# Altium PCB MOTORDEMO.PcbDoc
Units mil, origin at the board's own origin, x right, y up, seen from the top; angles counter-clockwise.
Board outline 2390 x 1595 mil, 2 copper layers (Top Layer, Bottom Layer); 56 components, 55 nets, 192 pads, 144 vias.
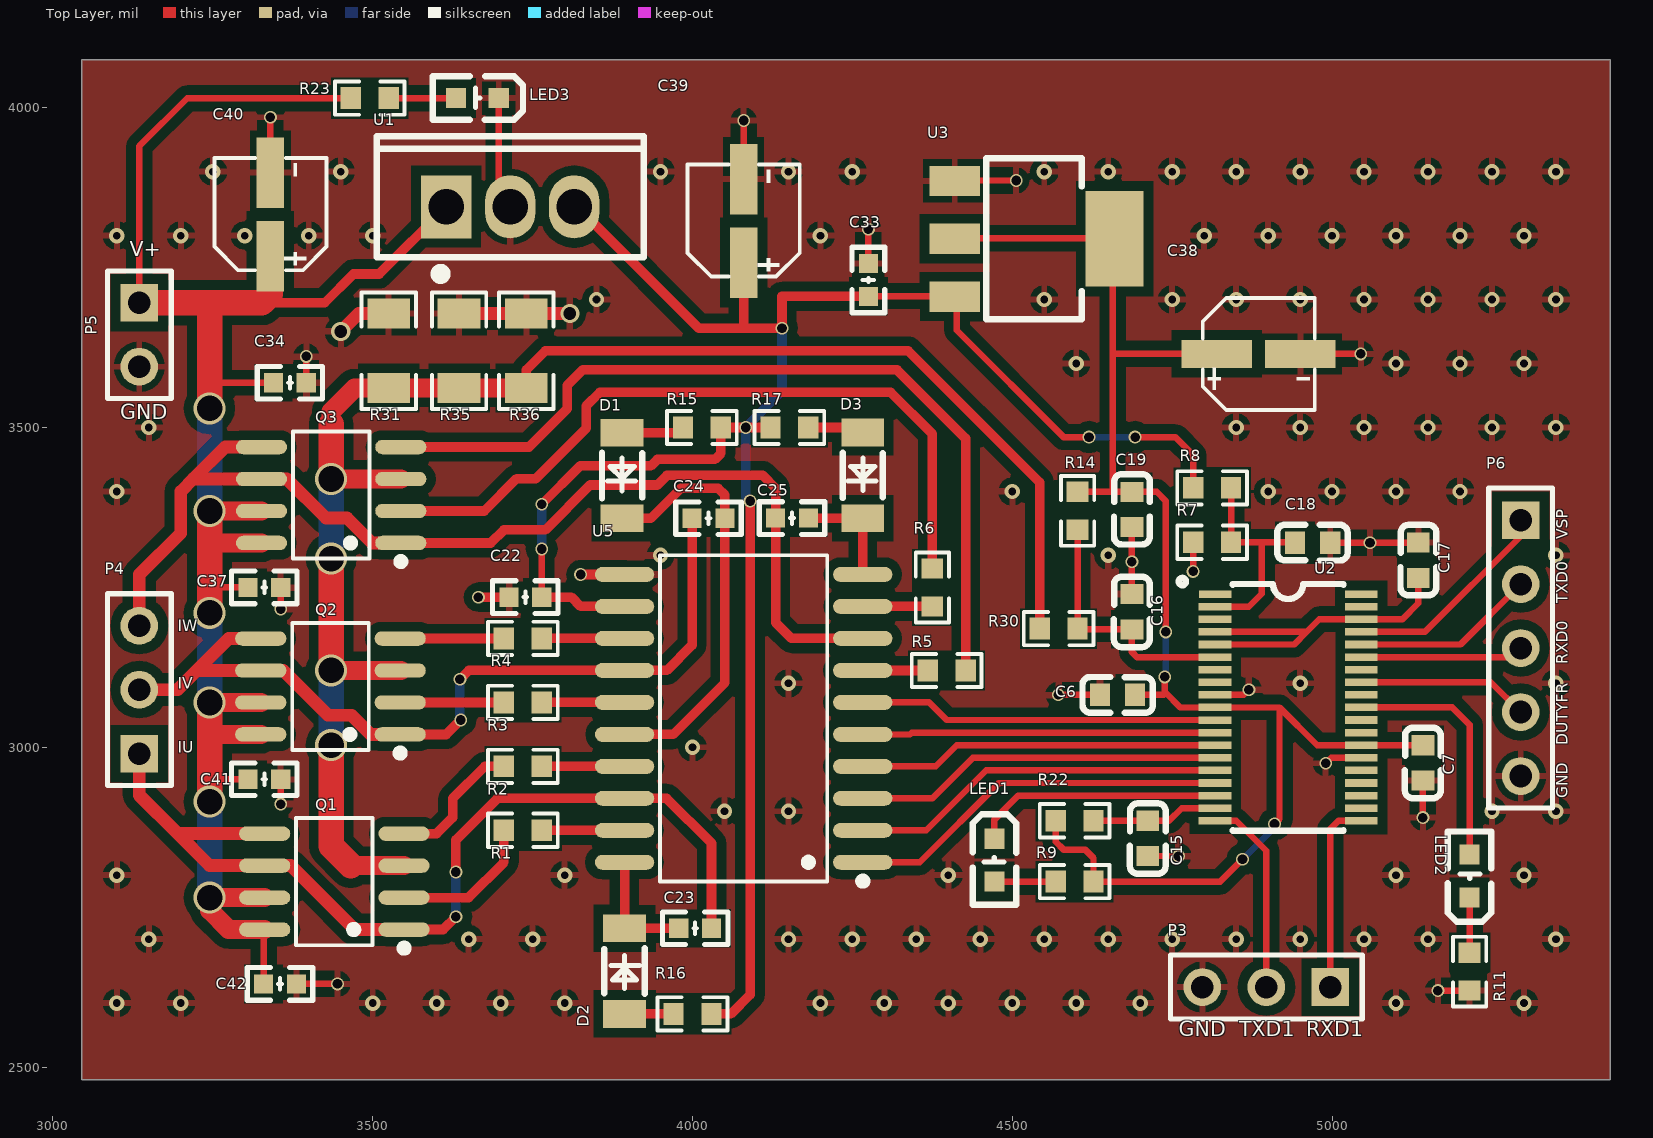
[diagram p0: Top Layer view]
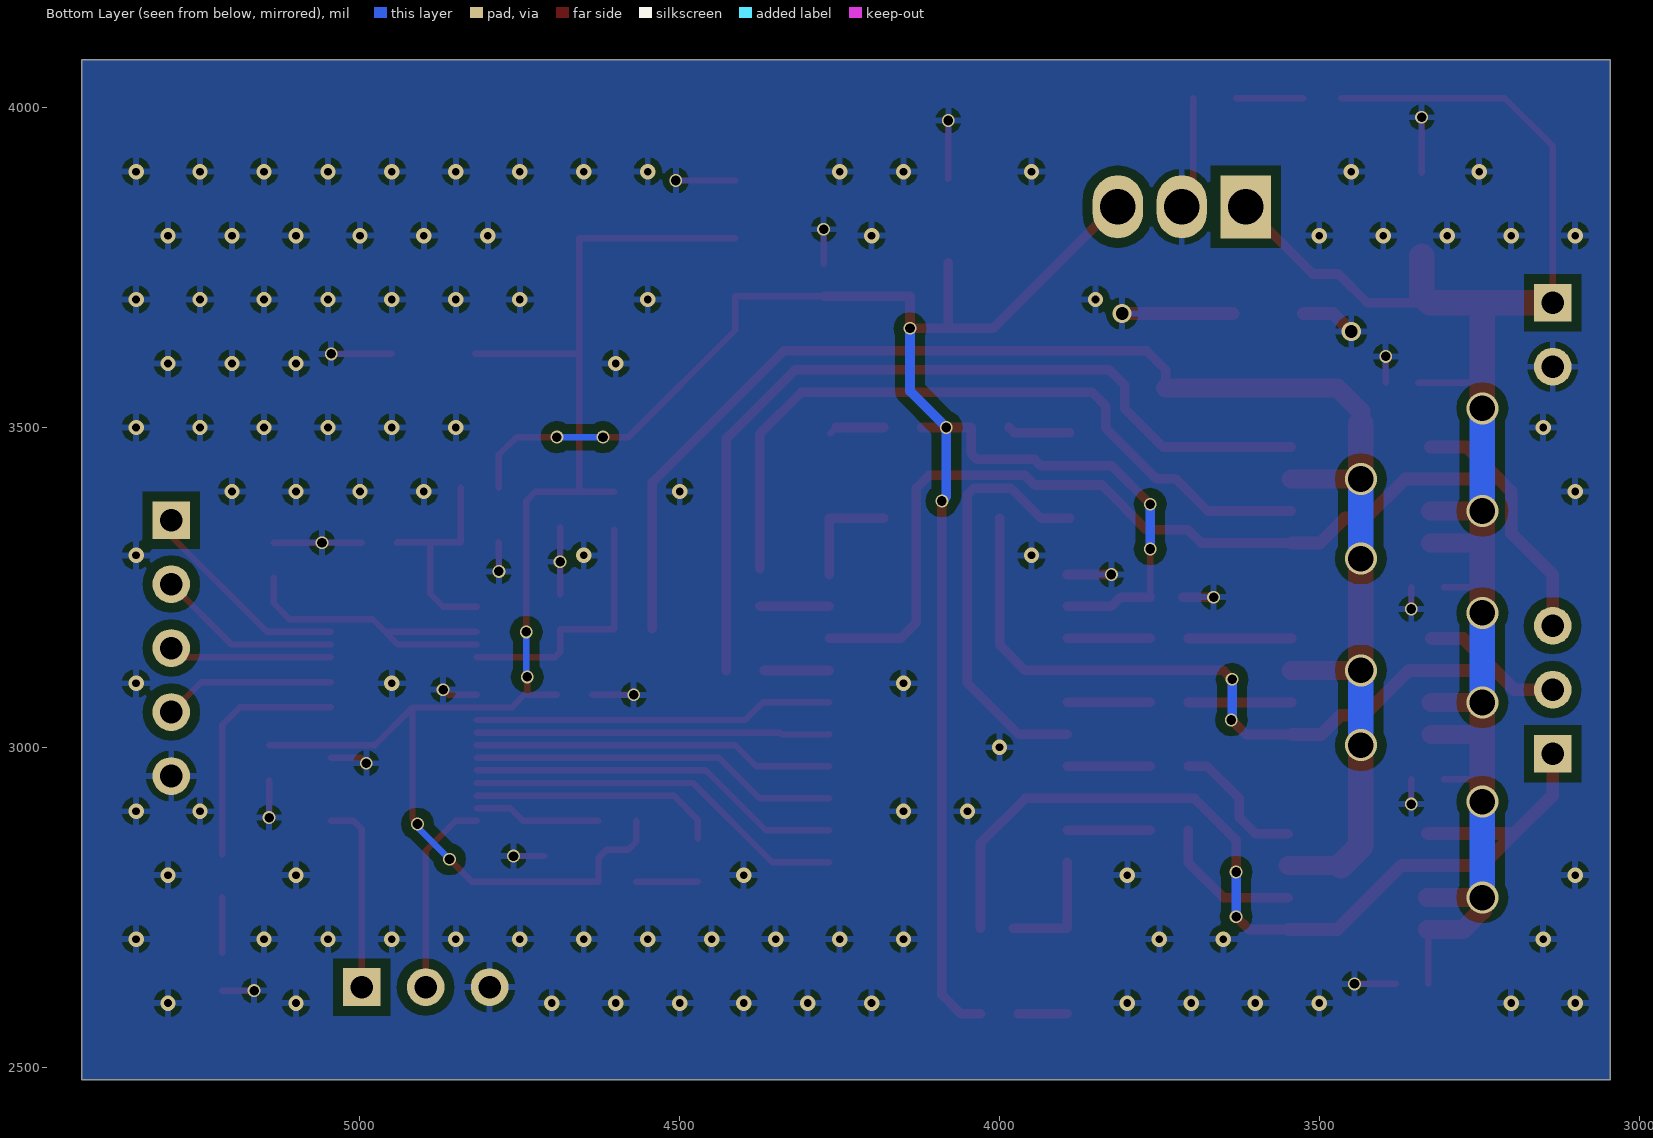
[diagram p1: Bottom Layer view, seen from below]

## Layer stack, top to bottom
Top Solder: solder mask 0.4, Solder Resist, Dk 3.5
Top Layer: signal copper 1.4
Dielectric 1: dielectric 12.6, FR-4, Dk 4.8
Bottom Layer: signal copper 1.4
Bottom Solder: solder mask 0.4, Solder Resist, Dk 3.5

## Board outline
3045,2480 3045,4075 5435,4075 5435,2480

## Design rules (kind name [scope] priority, off if disabled: settings)
Clearance [All] p1: gap=15 ignorepadtopadclearanceinfootprint=FALSE
PolygonConnect [All] p1: connectstyle=Relief reliefconductorwidth=10 reliefentries=4 polygonreliefangle="90 Angle" airgapwidth=10
RoutingVias [All] p1: holewidth=28 width=50 viastyle="Through Hole" minholewidth=28 minwidth=50 maxholewidth=28 maxwidth=50
SolderMaskExpansion [All] p1: expansion=4
Width [All] p1: maxlimit=10 minlimit=10 preferedwidth=10
30 further rules are at their usual default settings.

## Components (designator, comment, footprint, x,y, rotation, side; value= is the part's Value field where it differs from the comment)
C6 "1uF" C0603 4664.5,3081.95 r180 top
C7 "1uF" C0603 5142.06,2975.66 r90 top
C15 "10nF" C0603 4712.06,2857.45 r90 top
C16 "220pF" C0603 4687.06,3211.93 r90 top
C17 "10nF" C0603 5135,3292.34 r270 top
C18 "10nF" C0603 4969.61,3319.89 r0 top
C19 "1uF" C0603 4687.06,3371.76 r270 top
C22 "1uF" "C 0603_L" 3738.72,3234.69 r0 top
C23 "0.1uF" "C 0603_L" 4004.06,2716.93 r180 top
C24 "0.1uF" "C 0603_L" 4025,3358.07 r0 top
C25 "0.1uF" "C 0603_L" 4155.59,3358.24 r180 top
C33 "100nF" "C 0603_L" 4275,3730.59 r90 top
C34 "330nF" "C 0603_L" 3370.59,3570 r0 top
C37 "330nF" "C 0603_L" 3330.59,3250 r180 top
C38 "10uF" 10uF,35V,cap4*5.4 4885,3615 r0 top value=100uF
C39 "10uF" 10uF,35V,cap4*5.4 4080,3823.11 r90 top value=100uF
C40 "10uF" 10uF,35V,cap4*5.4 3340,3833.11 r90 top value=100uF
C41 "330nF" "C 0603_L" 3330.59,2950 r180 top
C42 "330nF" "C 0603_L" 3355,2630 r180 top
D1 "SS16-LTP" LL-34_L3.5-W1.5-RD 3890,3425 r90 top
D2 "SS16-LTP" LL-34_L3.5-W1.5-RD 3893.78,2650 r270 top
D3 "SS16-LTP" LL-34_L3.5-W1.5-RD 4266.22,3425.17 r90 top
LED1 "LED" LED0603-R-RD 4472.06,2823.5 r270 top
LED2 "LED" LED0603-R-RD 5215,2798.84 r90 top
LED3 "LED" LED0603-R-RD 3663.5,4015 r180 top
P3 "Header 3" HDR1X3 4997.17,2625 r180 top
P4 "Header 3" HDR1X3 3135,2990 r90 top
P5 "Header 2" HDR1X2 3135,3695 r270 top
P6 "Header 5" HDR1X5 5295,3355 r270 top
Q1 "NCE6005AS_C558201" NCE6005AS 3440,2790 r90 top
Q2 "NCE6005AS_C558201" NCE6005AS 3433.97,3095 r90 top
Q3 "NCE6005AS_C558201" NCE6005AS 3435,3394.41 r90 top
R1 "22" R0603 3734.66,2870.17 r0 top
R2 "22" R0603 3734.66,2970.17 r0 top
R3 "22" R0603 3734.66,3070.17 r0 top
R4 "22" R0603 3734.66,3170.17 r0 top
R5 "22" R0603 4397.46,3120 r0 top
R6 "22" R0603 4375,3249.82 r90 top
R7 "30K" R0603 4812.4,3320.59 r0 top
R8 "100K" R0603 4812.4,3405.59 r180 top
R9 "22K" R0603 4597.4,2790 r0 top
R11 "22K" R0603 5215,2649.19 r90 top
R14 "10K" R0603 4602.06,3369.66 r270 top
R15 "5.1" R0603 4014.66,3500 r0 top
R16 "5.1" R0603 4000,2583.07 r0 top
R17 "5.1" R0603 4151.53,3500 r0 top
R22 "2K" R0603 4597.4,2885 r0 top
R23 "20K" R0603 3495.34,4015 r0 top
R30 "2K" R0603 4572.4,3185.49 r180 top
R31 "1" R1206 3525,3620 r270 top
R35 "1" R1206 3635,3620 r270 top
R36 "1" R1206 3740,3620 r270 top
U1 "7812" TO-220-3_L10.0-W4.5-P2.54-L 3715,3845 r0 top
U2 "IMC101T-T038" IMC101T-T038 4931.27,3062.28 r270 top
U3 "AMS1117-3.3_C498117" PG-SOT223-4_L6.5-W3.5-P2.30-LS7.0-BR 4535,3795 r180 top
U5 "FAN7888MX" FAN7888 4080,3045.17 r90 top

## Footprints (in the part's own frame and the unit in brackets; to place one, negate y for a bottom-side part, rotate by r counter-clockwise, add the part's x,y. Pads: shape width x height; smd on the part's side, far side on the other; paste and mask are expansions set on the pad)
10uF,35V,cap4*5.4 [mm] "CAP-SMD_BD4.0-L4.3-W4.3-FD"
  rect 2.8x1.1 smd: 1(-1.66,0) 2(1.66,0)
  silkscreen extent -2.22,-2.23 2.24,2.23
C0603 [mm] "C15725"
  rect 0.8x0.9 smd: 1(-0.7,0) 2(0.7,0)
  silkscreen extent -1.41,-0.71 1.39,0.72
"C 0603_L" [mil] "无极性贴片电容"
  rect 30x30 smd: 1(-25.59,0) 2(25.59,0)
  silkscreen extent -51,-26 51,26, body extent -31,-16 31,16, height 32
FAN7888 [mm] "SOIC-20_L13.0-W7.6-P1.27-LS10.3-BL"
  oval 0.595x2.36 smd: 1(-5.715,-4.73) 2(-4.445,-4.73) 3(-3.175,-4.73) 4(-1.905,-4.73) 5(-0.635,-4.73) 6(0.635,-4.73) 7(1.905,-4.73) 8(3.175,-4.73) 9(4.445,-4.73) 10(5.715,-4.73) 11(5.715,4.73) 12(4.445,4.73) 13(3.175,4.73) 14(1.905,4.73) 15(0.635,4.73) 16(-0.635,4.73) 17(-1.905,4.73) 18(-3.175,4.73) 19(-4.445,4.73) 20(-5.715,4.73)
  silkscreen extent -6.61,-4.88 6.48,3.32
HDR1X2 [mm] "Connector; Header; 2 Position"
  rect 1.5x1.5 hole 0.9: 1(0,0)
  round 1.5 hole 0.9: 2(2.54,0)
  silkscreen extent -1.27,-1.27 3.81,1.27
HDR1X3 [mm] "Connector; Header; 3 Position"
  rect 1.5x1.5 hole 0.9: 1(0,0)
  round 1.5 hole 0.9: 2(2.54,0) 3(5.08,0)
  silkscreen extent -1.27,-1.27 6.35,1.27
HDR1X5 [mm] "Connector; Header; 5 Position"
  rect 1.5x1.5 hole 0.9: 1(0,0)
  round 1.5 hole 0.9: 2(2.54,0) 3(5.08,0) 4(7.62,0) 5(10.16,0)
  silkscreen extent -1.27,-1.27 11.43,1.27
IMC101T-T038 [mm] "TSSOP-38_L9.7-W4.4-P0.50-LS6.4-BL"
  rect 0.3x1.3 smd: 1(-4.501,-2.899) 2(-3.999,-2.901) 3(-3.498,-2.901) 4(-2.999,-2.901) 5(-2.499,-2.901) 6(-1.999,-2.901) 7(-1.499,-2.901) 8(-0.999,-2.901) 9(-0.499,-2.901) 10(0.001,-2.901) 11(0.501,-2.901) 12(1.001,-2.901) 13(1.501,-2.901) 14(2.001,-2.901) 15(2.501,-2.901) 16(3.001,-2.901) 17(3.501,-2.901) 18(4.001,-2.901) 19(4.501,-2.901) 20(4.5,2.899) 21(4.001,2.9) 22(3.501,2.899) 23(3.002,2.899) 24(2.499,2.901) 25(2,2.9) 26(1.5,2.9) 27(1,2.9) 28(0.5,2.9) 29(0,2.9) 30(-0.5,2.9) 31(-1,2.9) 32(-1.5,2.9) 33(-2,2.9) 34(-2.5,2.9) 35(-3,2.9) 36(-3.5,2.9) 37(-4,2.9) 38(-4.5,2.9)
  silkscreen extent -5.14,-4.34 4.9,2.2
LED0603-R-RD [mm] "C181863"
  rect 0.8x0.8 smd: 1(0.851,0) 2(-0.851,0)
  silkscreen extent -1.82,-0.86 1.77,0.86
LL-34_L3.5-W1.5-RD [mm] "二极管玻璃"
  rect 1.1x1.7 smd: 1(-1.7,0) 2(1.7,0)
  silkscreen extent -0.9,-0.8 0.9,0.8
NCE6005AS [mil] "SOP-8_L5.0-W4.0-P1.27-LS6.0-BL"
  oval 22.6x80.14 smd: 1(-75,-108.97) 2(-25,-108.97) 3(25,-108.97) 4(75,-108.97) 5(75,108.97) 6(25,108.97) 7(-25,108.97) 8(-75,108.97)
  silkscreen extent -110,-115 99,60
PG-SOT223-4_L6.5-W3.5-P2.30-LS7.0-BR [mm]
  rect 2x1.2 smd: 1(3.175,-2.3) 2(3.175,0) 3(3.175,2.3)
  rect 2.3x3.8 smd: 4(-3.175,0)
  silkscreen extent -1.87,-3.2 1.93,3.2
R0603 [mil] "C327832"
  rect 31.75x34.02 smd: 1(-29.66,0) 2(29.65,0)
  silkscreen extent -55,-26 55,26
R1206 [mil]
  rect 47.54x66.97 smd: 1(-58.22,0) 2(58.22,0)
  silkscreen extent -91,-42 91,42
TO-220-3_L10.0-W4.5-P2.54-L [mm]
  rect 2x2.5 hole 1.4: 1(-2.54,0)
  oval 2x2.5 hole 1.4: 2(0,0) 3(2.54,0)
  silkscreen extent -5.3,-2.86 5.3,2.8

## Part data
C6 C7 C15 C16 C17 C18 C19: library part 100nF, BOM_JLCPCB Part Class="Extended Part", BOM_Manufacturer=SAMSUNG, BOM_Manufacturer Part=CL10B104KC8NNNC, BOM_Supplier=LCSC, BOM_Supplier Part=C15725, nameAlias=Capacitance, spicePre=C, spiceSymbolName=CL10B104KC8NNNC
C22 C23 C24 C25 C33 C34 C37 C41 C42: library part CAP, "Capacitor"
C38 C39 C40: library part "Cap Pol3", "Polarized Capacitor (Surface Mount)", LatestRevisionDate=29-May-2009, LatestRevisionNote="IPC-7351 Footprint Added.", PackageDescription="Chip Capacitor", PackageReference=C0805, Published=8-Jun-2000, Publisher="Altium Limited"
D1 D2 D3: BOM_JLCPCB Part Class="Extended Part", BOM_Manufacturer=MCC, BOM_Manufacturer Part=SS16-LTP, BOM_Supplier=LCSC, BOM_Supplier Part=C85689, spicePre=D, spiceSymbolName=SS16-LTP
LED1 LED2 LED3: BOM_JLCPCB Part Class="Extended Part", BOM_Manufacturer="Everlight Elec", BOM_Manufacturer Part=19-213/R6W-BP2Q2B/3T, BOM_Supplier=LCSC, BOM_Supplier Part=C181863, Contributor=LCSC, spicePre=L, spiceSymbolName=19-213/R6W-BP2Q2B/3T
P3 P4: "Header, 3-Pin", LatestRevisionDate=17-Jul-2002, LatestRevisionNote="Re-released for DXP Platform.", Publisher="Altium Limited"
P5: "Header, 2-Pin", LatestRevisionDate=17-Jul-2002, LatestRevisionNote="Re-released for DXP Platform.", Publisher="Altium Limited"
P6: "Header, 5-Pin", LatestRevisionDate=17-Jul-2002, LatestRevisionNote="Re-released for DXP Platform.", Publisher="Altium Limited"
Q1 Q2 Q3: BOM_JLCPCB Part Class="Extended Part", BOM_Manufacturer="VBsemi Elec", BOM_Manufacturer Part=NCE6005AS, BOM_Supplier=LCSC, BOM_Supplier Part=C558201, Contributor=LCSC, spicePre=Q, spiceSymbolName=NCE6005AS_C558201
R1 R2 R3 R4 R5 R6 R7 R8 R9 R11 R14 R15 R16 R17 R22 R23 R30 R31 R35 R36: library part 1M, BOM_Manufacturer="Huaxin S&T", BOM_Manufacturer Part=MR06X105JTL, BOM_Supplier=LCSC, BOM_Supplier Part=C327832, Contributor=LCSC, nameAlias="Resistance (Ohms)", spicePre=R, spiceSymbolName=MR06X105JTL
U1: BOM_JLCPCB Part Class="Extended Part", BOM_Manufacturer="Foshan Blue Rocket Elec", BOM_Manufacturer Part=7812, BOM_Supplier=LCSC, BOM_Supplier Part=C358369, Contributor=LCSC, spicePre=U, spiceSymbolName=7812
U2: BOM_JLCPCB Part Class="Extended Part", BOM_Manufacturer="Infineon Technologies", BOM_Manufacturer Part=IMC101T-T038, BOM_Supplier=LCSC, BOM_Supplier Part=C536267, Contributor=LCSC, spicePre=U, spiceSymbolName=IMC101T-T038
U3: BOM_Manufacturer="HGC(Huaguan Semicon)", BOM_Manufacturer Part=AMS1117-3.3, BOM_Supplier=LCSC, BOM_Supplier Part=C498117, Contributor=LCSC, spicePre=U, spiceSymbolName=AMS1117-3.3_C498117
U5: BOM_JLCPCB Part Class="Extended Part", BOM_Manufacturer="ON Semicon", BOM_Manufacturer Part=FAN7888MX, BOM_Supplier=LCSC, BOM_Supplier Part=C258167, Contributor=LCSC, spicePre=U, spiceSymbolName=FAN7888MX

## Via types
v1: diameter 24, hole 12, Top Layer to Bottom Layer, tented both sides, 97 vias
v2: diameter 20, hole 15, Top Layer to Bottom Layer, tented both sides, 35 vias
v3: diameter 50, hole 40, Top Layer to Bottom Layer, tented both sides, 10 vias
v4: diameter 30, hole 20, Top Layer to Bottom Layer, tented both sides, 2 vias

## Nets (pads, with @x,y where several pads share a name; then routed paths per layer and width w, separated by ;. In a path a pad name is that pad's centre, name@x,y a point inside that pad or via, vN(x,y) a via of type N, cw(c..) or ccw(c..) an arc to the next point about the centre after c; other vN are vias at no path point)
+3.3V: C6.1 C7.2 C19.1 C38.1 R9.2 R14.1 R22.1 U2.10 U2.26 U3.2 U3.4 | length 2383
  Top Layer w10: U3.2@4413,3795.55 4657,3795.55 4657,3615 ; R22.1 4567.75,2852.25 4580,2840 4613.78,2840 4627.06,2826.72 R9.2 4825,2790 v2(4860,2825) ; R14.1 4655,3399.31 ; C6.1 4736.95,3081.95 4738.36,3083.36 4738.36,3086.64 ; v2(4738.36,3110) 4738.36,3086.64 ; v2(4740,3180.38) 4740,3385 4725.69,3399.31 C19.1 4655,3399.31 ; C38.1 4657,3615 ; v2(4910,2880) 4917.77,2887.77 4917.77,3062.23 ; C7.2 U2.26 4976.79,3003.21 4917.77,3062.23 ; 4655,3399.31 4657,3401.31 4657,3615 ; 4738.36,3086.64 4762.77,3062.23 U2.10 4917.77,3062.23
  Bottom Layer w10: v2(4738.36,3110) 4740,3111.64 v2(4740,3180.38) ; v2(4860,2825) 4910,2875 v2(4910,2880)
+12V: C22.2 C33.1 C39.1 R8.2 R15.2 R16.2 R17.1 U1.3 U3.3 U5.12 | length 3238.1
  Top Layer w10: C22.2 v2(3764.31,3310) ; U1.3 U1.3@3820,3845 ; C33.1 4413,3705 4413,3652 4580,3485 v2(4620,3485) ; v2(4692.06,3485) 4755,3485 4782.75,3457.25 R8.2
  Top Layer w15: C22.2 3810.49,3234.68 3825,3220.17 U5.12 ; v2(3764.31,3380) 3824.31,3440 3935,3440 3945.07,3450.07 4035,3450.07 4044.31,3459.38 R15.2 v2(4083.09,3500) R17.1 ; U1.3@3820,3845 4010,3655 4080,3655 ; R16.2 4060,2583.07 4090,2613.07 v2(4090,3385) ; C39.1 4080,3655 ; C33.1 4140,3705 v2(4140,3655) 4080,3655
  Bottom Layer w10: v2(3764.31,3310) 3765,3310.69 v2@3764.31,3311.38 ; v2(4620,3485) v2(4692.06,3485)
  Bottom Layer w15: v2@3764.31,3311.38 v2(3764.31,3380) ; v2(4090,3385) 4083.09,3391.91 v2(4083.09,3500) 4140,3556.91 v2(4140,3655)
DIR: U2.28
DUTYFR: P6.4 U2.31 | length 268.9
  Top Layer w10: U2.31 5248.36,3101.64 P6.4
GK: C15.2 R22.2 U2.18 | length 198.2
  Top Layer w10: R22.2 C15.2 4745,2885 4764.75,2904.75 U2.18
GND: C6.2 C7.1 C15.1 C16.2 C17.1 C18.2 C19.2 C22.1 C33.2 C34.2 C37.1 C38.2 C39.2 C40.2 C41.1 C42.1 LED3.2 P3.3 P5.2 P6.5 R7.1 R11.1 R31.1 R35.1 R36.1 U1.2 U2.9 U2.25 U3.1 U5.11 | length 1775.6
  Top Layer w10: C40.2 v2(3340,3985) ; v2(3356.18,2911.18) C41.1 ; v2(3356.18,3216.18) C37.1 ; C42.1 v2(3445,2630) ; C34.2 v2(3396.18,3611.18) ; LED3.2 3697,3863 U1.2 ; C39.2 v2(4080,3980) ; C33.2 v2(4275,3810) ; U3.1@4413,3886.1 v2(4506.1,3886.1) ; v2(4571.95,3081.95) C6.2 ; C16.2 v2(4687.06,3290) C19.2 ; C15.1 v2(4759.89,2829.89) ; v2(4782.75,3275) R7.1 ; U2.9 4861.91,3081.91 v2(4870,3090) ; C38.2 v2(5045,3615) ; v2(4990,2975) 4998.53,2983.53 U2.25 ; C18.2 v2(5059.3,3319.89) C17.1 ; v2(5142.06,2890) C7.1 ; v2(5165.47,2619.53) R11.1
  Top Layer w15: v2(3665.32,3234.68) C22.1 ; v2(3825,3270.17) U5.11
  Top Layer w20: v4(3450,3650) 3478.22,3678.22 R31.1 ; R35.1 R36.1 v4(3808.22,3678.22)
  other v1: 3100,2600 3200,2600 3500,2600 3600,2600 3700,2600 3800,2600 4200,2600 4300,2600 4400,2600 4500,2600 4600,2600 4700,2600 5100,2600 5300,2600 3150,2700 3650,2700 3750,2700 4150,2700 4250,2700 4350,2700 4450,2700 4550,2700 4650,2700 4750,2700 4850,2700 4950,2700 5050,2700 5150,2700 5350,2700 3100,2800 3800,2800 4400,2800 5100,2800 5300,2800 4050,2900 4150,2900 5250,2900 5350,2900 4000,3000 4150,3100 4950,3100 5350,3100 3950,3300 4650,3300 5350,3300 3100,3400 4500,3400 4900,3400 5000,3400 5100,3400 5200,3400 3150,3500 4850,3500 4950,3500 5050,3500 5150,3500 5250,3500 5350,3500 4600,3600 5100,3600 5200,3600 5300,3600 3850,3700 4550,3700 4750,3700 4850,3700 4950,3700 5050,3700 5150,3700 5250,3700 5350,3700 3100,3800 3200,3800 3300,3800 3400,3800 3500,3800 4200,3800 4800,3800 4900,3800 5000,3800 5100,3800 5200,3800 5300,3800 3250,3900 3450,3900 3950,3900 4150,3900 4250,3900 4550,3900 4650,3900 4750,3900 4850,3900 4950,3900 5050,3900 5150,3900 5250,3900 5350,3900
GPIO8: U2.30
GPIO9: U2.32
HO1: Q1.2 R1.1 | length 229
  Top Layer w15: Q1.2 3650,2765 3705,2820 R1.1
HO2: Q2.2 R3.1 | length 162.8
  Top Layer w10: Q2.2 Q2.2@3543.42,3070.49 ; R3.1@3704.83,3070 R3.1
  Top Layer w15: Q2.2 R3.1@3704.83,3070
HO3: Q3.2 R6.2 | length 1165.9
  Top Layer w15: Q3.2 3674.41,3369.41 3725,3420 3755,3420 3834.04,3499.04 3834.04,3534.04 3855,3555 4310,3555 4375,3490 R6.2
IU: C23.1 P4.1 Q1.1 Q1.5 Q1.6 U5.18 | length 1500.1
  Top Layer w15: Q1.1 3610,2715 v2(3630,2735) ; v2(3630,2805) 3630,2855 3695.17,2920.17 U5.18 3959.49,2920.17 4029.66,2850 C23.1
  Top Layer w20: P4.1 3135,2925 3195,2865 ; Q1.5 3195,2865 ; Q1.1 3471.93,2715 3371.93,2815 Q1.6 3245,2815 3195,2865
  Bottom Layer w15: v2(3630,2735) v2(3630,2805)
IU+: C16.1 R14.2 R30.1 U2.6 | length 408.7
  Top Layer w10: R14.2 R30.1 4603.16,3184.38 C16.1 4687.06,3148.91 4695,3140.97 U2.6
IV: C24.1 P4.2 Q2.1 Q2.5 Q2.6 U5.14 | length 1334.5
  Top Layer w15: Q2.1 3614.83,3020 v2(3637.5,3042.67) ; v2(3636.25,3106.25) 3650.17,3120.17 U5.14 3960.03,3120.17 3999.41,3159.55 C24.1
  Top Layer w20: P4.2 3194.83,3090 3224.83,3120 ; Q2.5 3274.83,3170 3224.83,3120 ; Q2.1 3496.93,3020 3466.93,3050 3430,3050 3360,3120 Q2.6 3224.83,3120
  Bottom Layer w10: v2@3636.25,3043.92 v2(3637.5,3042.67)
  Bottom Layer w15: v2@3636.25,3043.92 v2(3636.25,3106.25)
IW: C25.2 P4.3 Q3.1 Q3.5 Q3.6 U5.8 | length 1751.9
  Top Layer w10: 3220,3420 3220.59,3419.41
  Top Layer w15: Q3.1 3684.41,3319.41 3705,3340 3770,3340 3840,3410 3945,3410 3960,3425 4110,3425 4130,3405 C25.2 4130,3195 4154.83,3170.17 U5.8
  Top Layer w20: P4.3 3135,3270 3200,3335 3200,3400 3220,3420 3269.41,3469.41 Q3.5 ; 3220.59,3419.41 Q3.6 3365.59,3419.41 3426.76,3358.24 3460,3358.24 3498.83,3319.41 Q3.1
LO1: Q1.4 R2.1 | length 217.2
  Top Layer w15: Q1.4 3600,2865 3625,2890 3625,2920 3675.17,2970.17 R2.1
LO2: Q2.4 R4.1 | length 162.1
  Top Layer w10: R4.1@3704.83,3170 R4.1
  Top Layer w15: Q2.4 R4.1@3704.83,3170
LO3: Q3.4 R5.2 | length 1361.9
  Top Layer w15: Q3.4 3744.41,3469.41 3804.04,3529.04 3804.04,3565.82 3828.22,3590 4320,3590 4427.11,3482.89 R5.2
NetC18_1: C18.1 R7.2 R8.1 U2.2 | length 347.2
  Top Layer w10: U2.2 4869.71,3219.71 4890,3240 4890,3320.59 ; R8.1 R7.2 4890,3320.59 ; C18.1 4941.36,3320.59 4890,3320.59
NetC23_2: C23.2 D2.1 U5.20 | length 187.9
  Top Layer w15: U5.20 D2.1 C23.2
NetC24_2: C24.2 D1.1 U5.16 | length 668.2
  Top Layer w15: D1.1 3935,3358.07 3981.93,3405 4040,3405 4050.59,3394.41 C24.2 4050.59,3100.9 3969.86,3020.17 U5.16
NetC25_1: C25.1 D3.1 U5.10 | length 173.1
  Top Layer w15: C25.1 D3.1 U5.10
NetD1_2: D1.2 R15.1 | length 98.3
  Top Layer w15: D1.2 3976.93,3491.93 R15.1
NetD2_2: D2.2 R16.1 | length 76.6
  Top Layer w15: D2.2 R16.1
NetD3_2: D3.2 R17.2 | length 87.4
  Top Layer w10: D3.2@4255.36,3500 D3.2@4264.74,3490.62
  Top Layer w15: R17.2 D3.2@4255.36,3500
NetLED1_1: LED1.1 R9.1 | length 95.7
  Top Layer w10: LED1.1 R9.1
NetLED1_2: LED1.2 U2.17 | length 390.5
  Top Layer w10: LED1.2 4472.06,2887.06 4509.43,2924.43 U2.17
NetLED2_1: LED2.1 U2.29 | length 383.5
  Top Layer w10: U2.29 5187.73,3062.27 5215,3035 LED2.1
NetLED2_2: LED2.2 R11.2 | length 86.5
  Top Layer w10: R11.2 LED2.2
NetLED3_1: LED3.1 R23.2 | length 105
  Top Layer w10: R23.2 LED3.1
NetR1_2: R1.2 U5.19 | length 129.5
  Top Layer w15: R1.2 U5.19
NetR2_2: R2.2 U5.17 | length 129.5
  Top Layer w15: R2.2 U5.17
NetR3_2: R3.2 U5.15 | length 129.5
  Top Layer w15: R3.2 U5.15
NetR4_2: R4.2 U5.13 | length 129.5
  Top Layer w15: R4.2 U5.13
NetR5_1: R5.1 U5.7 | length 101.7
  Top Layer w10: U5.7 U5.7@4266.39,3120
  Top Layer w15: U5.7@4266.39,3120 R5.1
NetR6_1: R6.1 U5.9 | length 108.8
  Top Layer w15: U5.9 R6.1
PAR0: U2.22
PAR1: U2.23
PAR2: U2.24
PAR3: U2.27
PGOUT: U2.21
PWMUH: U2.12 U5.5 | length 552.1
  Top Layer w10: U5.5 4266.39,3020 4339.83,3020 4342.69,3022.86 U2.12
PWMUL: U2.11 U5.6 | length 562.3
  Top Layer w10: U5.6 4369.83,3070.17 4397.46,3042.54 U2.11
PWMVH: U2.14 U5.3 | length 577.1
  Top Layer w10: U5.3 4375.17,2920.17 4438.49,2983.49 U2.14
PWMVL: U2.13 U5.4 | length 564.5
  Top Layer w10: U5.4 4380.17,2970.17 4413.17,3003.17 U2.13
PWMWH: U2.16 U5.1 | length 602.2
  Top Layer w10: U5.1 4355.17,2820.17 4479.12,2944.12 U2.16
PWMWL: U2.15 U5.2 | length 589.6
  Top Layer w10: U5.2 4365.52,2870.17 4459.15,2963.8 U2.15
REFU: C17.2 U2.4 U2.5 U2.36 | length 527.6
  Top Layer w10: U2.5 4940.65,3160.65 4960.34,3180.34 ; U2.4 4960.34,3180.34 ; C17.2 5135,3225 5110.06,3200.06 U2.36 4980.06,3200.06 4960.34,3180.34
RXD0: P6.3 U2.33 | length 255.4
  Top Layer w10: U2.33 5281.01,3141.01 P6.3
RXD1: P3.1 U2.20 | length 300.8
  Top Layer w10: P3.1 4997.17,2872.17 5010.09,2885.09 U2.20
Shunt: Q1.3 Q2.3 Q3.3 R30.2 R31.2 R35.2 R36.2 | length 2501.6
  Top Layer w15: R36.2 3740,3590 3770,3620 4337.06,3620 4542.75,3414.31 R30.2
  Top Layer w30: v3(3435,3120.17) Q2.3@3543.97,3120.17 ; v3(3435,3419.41) Q3.3 ; 3435,3505 3435,3525 3471.78,3561.78 R31.2 R35.2 R36.2 ; 3465.59,2815 Q1.3
  Top Layer w40: v3(3435,3003.21) 3435,2845.59 3465.59,2815 ; v3(3435,3120.17) v3(3435,3295) ; v3(3435,3419.41) 3435,3505
  Bottom Layer w40: v3(3435,3003.21) v3(3435,3120.17) ; v3(3435,3295) v3(3435,3419.41)
TXD0: P6.2 U2.34 | length 288.6
  Top Layer w10: U2.34 5200.69,3160.69 P6.2
TXD1: P3.2 U2.19 | length 312.6
  Top Layer w10: U2.19 4850.11,2885.06 4897.17,2838 P3.2
V+: C34.1 C37.2 C40.1 C41.2 C42.2 P5.1 Q1.7 Q1.8 Q2.7 Q2.8 Q3.7 Q3.8 R23.1 U1.1 | length 2994.1
  Top Layer w10: P5.1 3135,3940 3210,4015 R23.1 ; 3245,2950 C41.2 ; 3245,3250 C37.2 ; 3245,3570 C34.1 ; Q3.8 Q3.8@3329.41,3316.03 ; C42.2 3329.41,2713.38 Q1.8
  Top Layer w15: 3326.78,3695 3425,3695 3470,3740 3510,3740 U1.1
  Top Layer w30: 3245,3020 Q2.8 ; v3(3245,3070) Q2.7 ; 3245,3319.41 Q3.8 ; v3(3245,3369.41) Q3.7 ; Q1.8 3275,2715 3245,2745 v3(3245,2765) Q1.7
  Top Layer w40: P5.1 3245,3695 ; v3(3245,2915) 3245,2950 3245,3020 v3(3245,3070) ; v3(3245,3210) 3245,3250 3245,3319.41 v3(3245,3369.41) ; v3(3245,3530) 3245,3570 3245,3695 ; C40.1 3340,3708.22 3326.78,3695 3245,3695
  Bottom Layer w40: v3(3245,2765) v3(3245,2915) ; v3(3245,3070) v3(3245,3210) ; v3(3245,3369.41) v3(3245,3530)
VSP: P6.1 U2.35 | length 336.5
  Top Layer w10: U2.35 5145.38,3180.38 5295,3330 P6.1
pads on no net: U2.1 U2.3 U2.7 U2.8 U2.37 U2.38

## Polygon pours and split planes (outlines as drawn)
GND on Top Layer "Top Layer-GND" (solid, pour order 14): 3045,4075 5435,4075 5435,2480 3045,2480
no net on Top Layer "Top Layer-No Net" (solid, pour order 12): 3045,4075
GND on Bottom Layer "Bottom Layer-GND" (solid, pour order 16): 3045,4075 5435,4075 5435,2480 3045,2480

## Silkscreen, mask and mechanical layers (free items; w line width, h text height)
Top Overlay:
  text "V+" at 3120,3760 h40
  text "GND" at 3105,3505 h40
  text "VSP" at 5375,3325 h30 r90
  text "TXD0" at 5375,3225 h30 r90
  text "IW" at 3195,3175 h30
  text "RXD0" at 5375,3130 h30 r90
  text "IV" at 3195,3085 h30
  text "DUTYFR" at 5375,3003.17 h30 r90
  text "IU" at 3195,2985 h30
  text "GND" at 5375,2920 h30 r90
  text "GND" at 4759.89,2540 h40
  text "TXD1" at 4855,2540 h40
  text "RXD1" at 4960,2540 h40
Mechanical 1:
  the board outline again, w10